# Altium PCB FuzzerFuca.PcbDoc
Units mm, origin at the board's own origin, x right, y up, seen from the top; angles counter-clockwise.
Board outline 40.1 x 45.1 mm, 2 copper layers (Top Layer, Bottom Layer); 19 components, 13 nets, 44 pads, 0 vias.
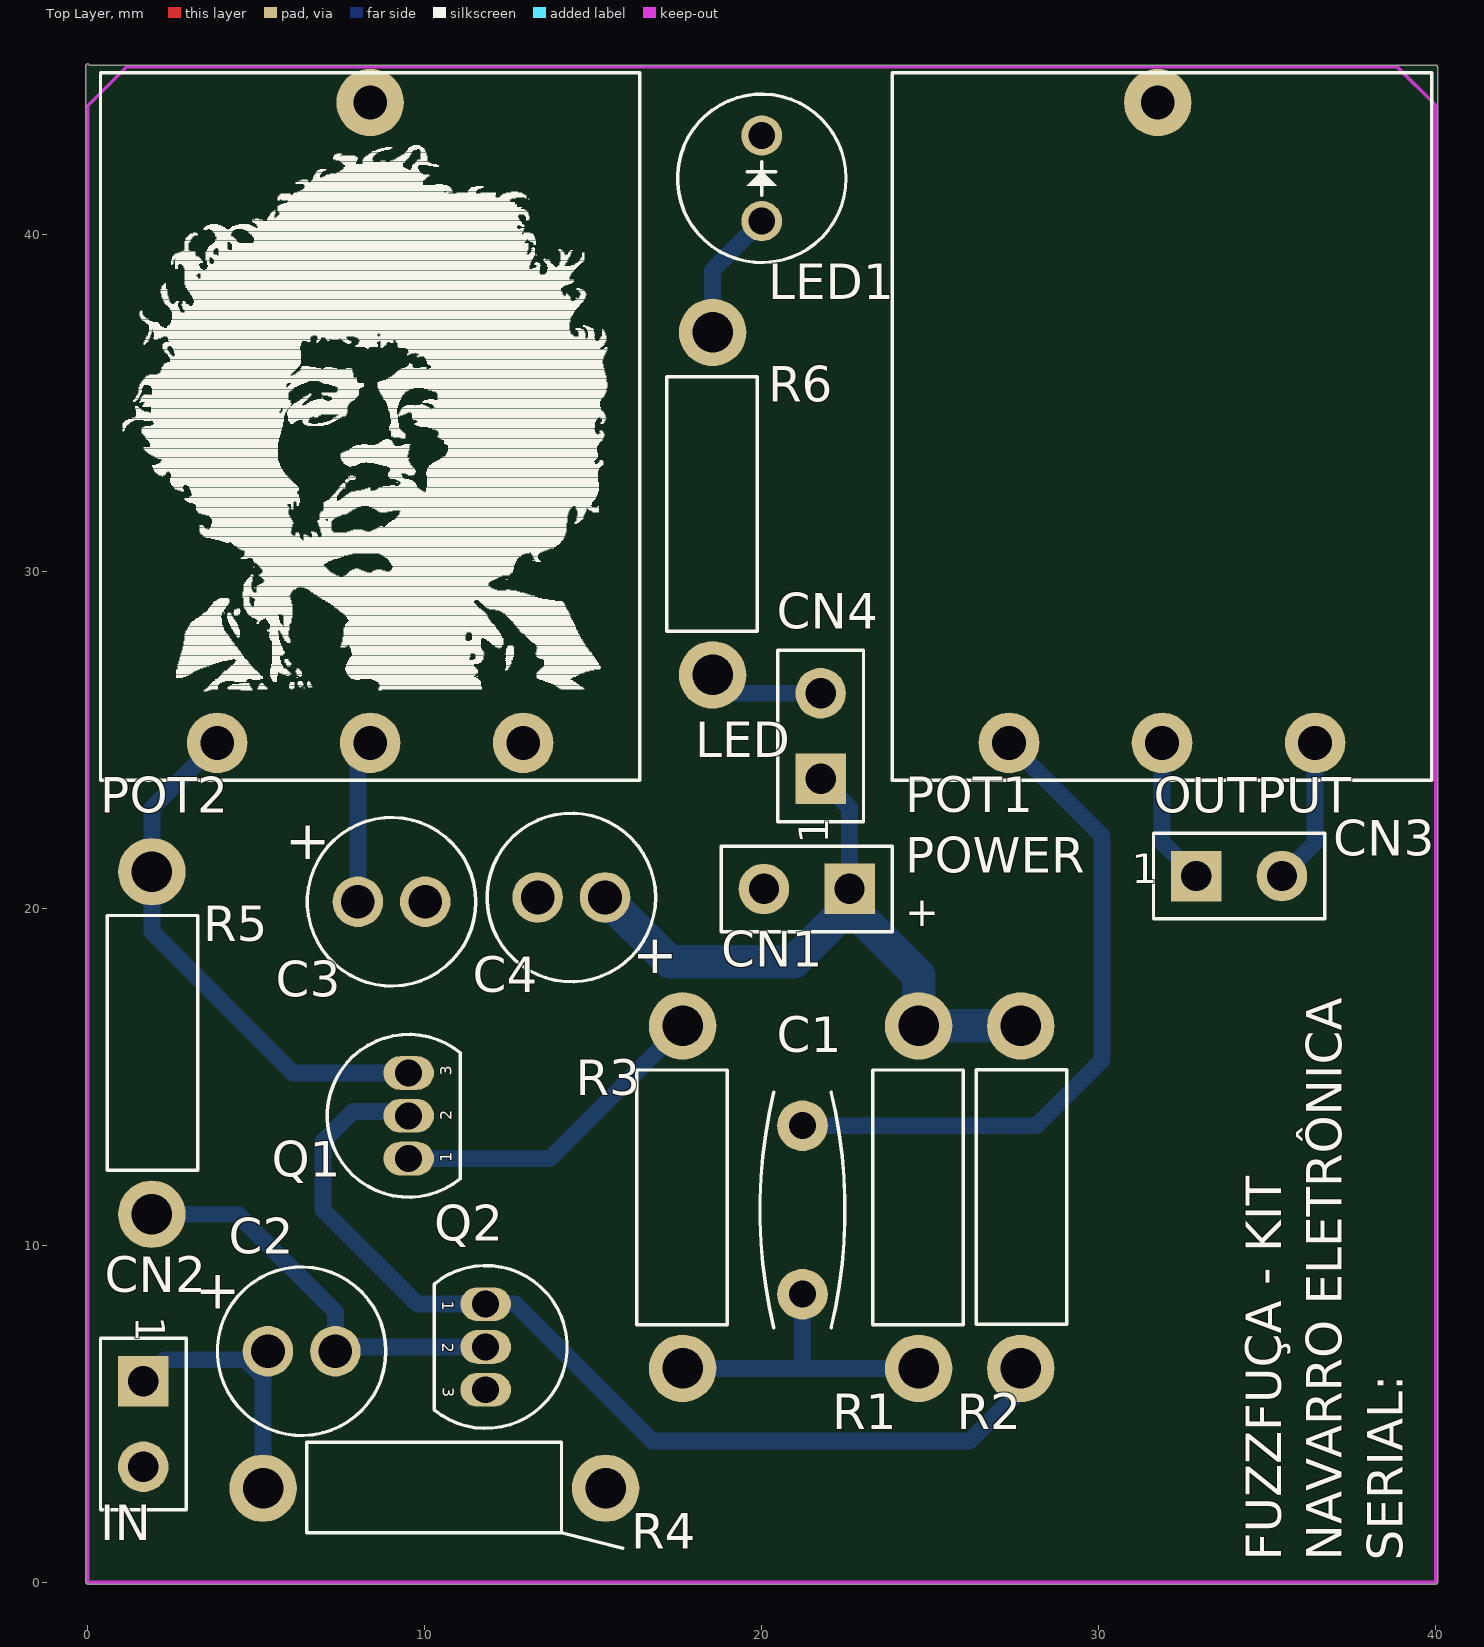
[diagram p0: Top Layer view]
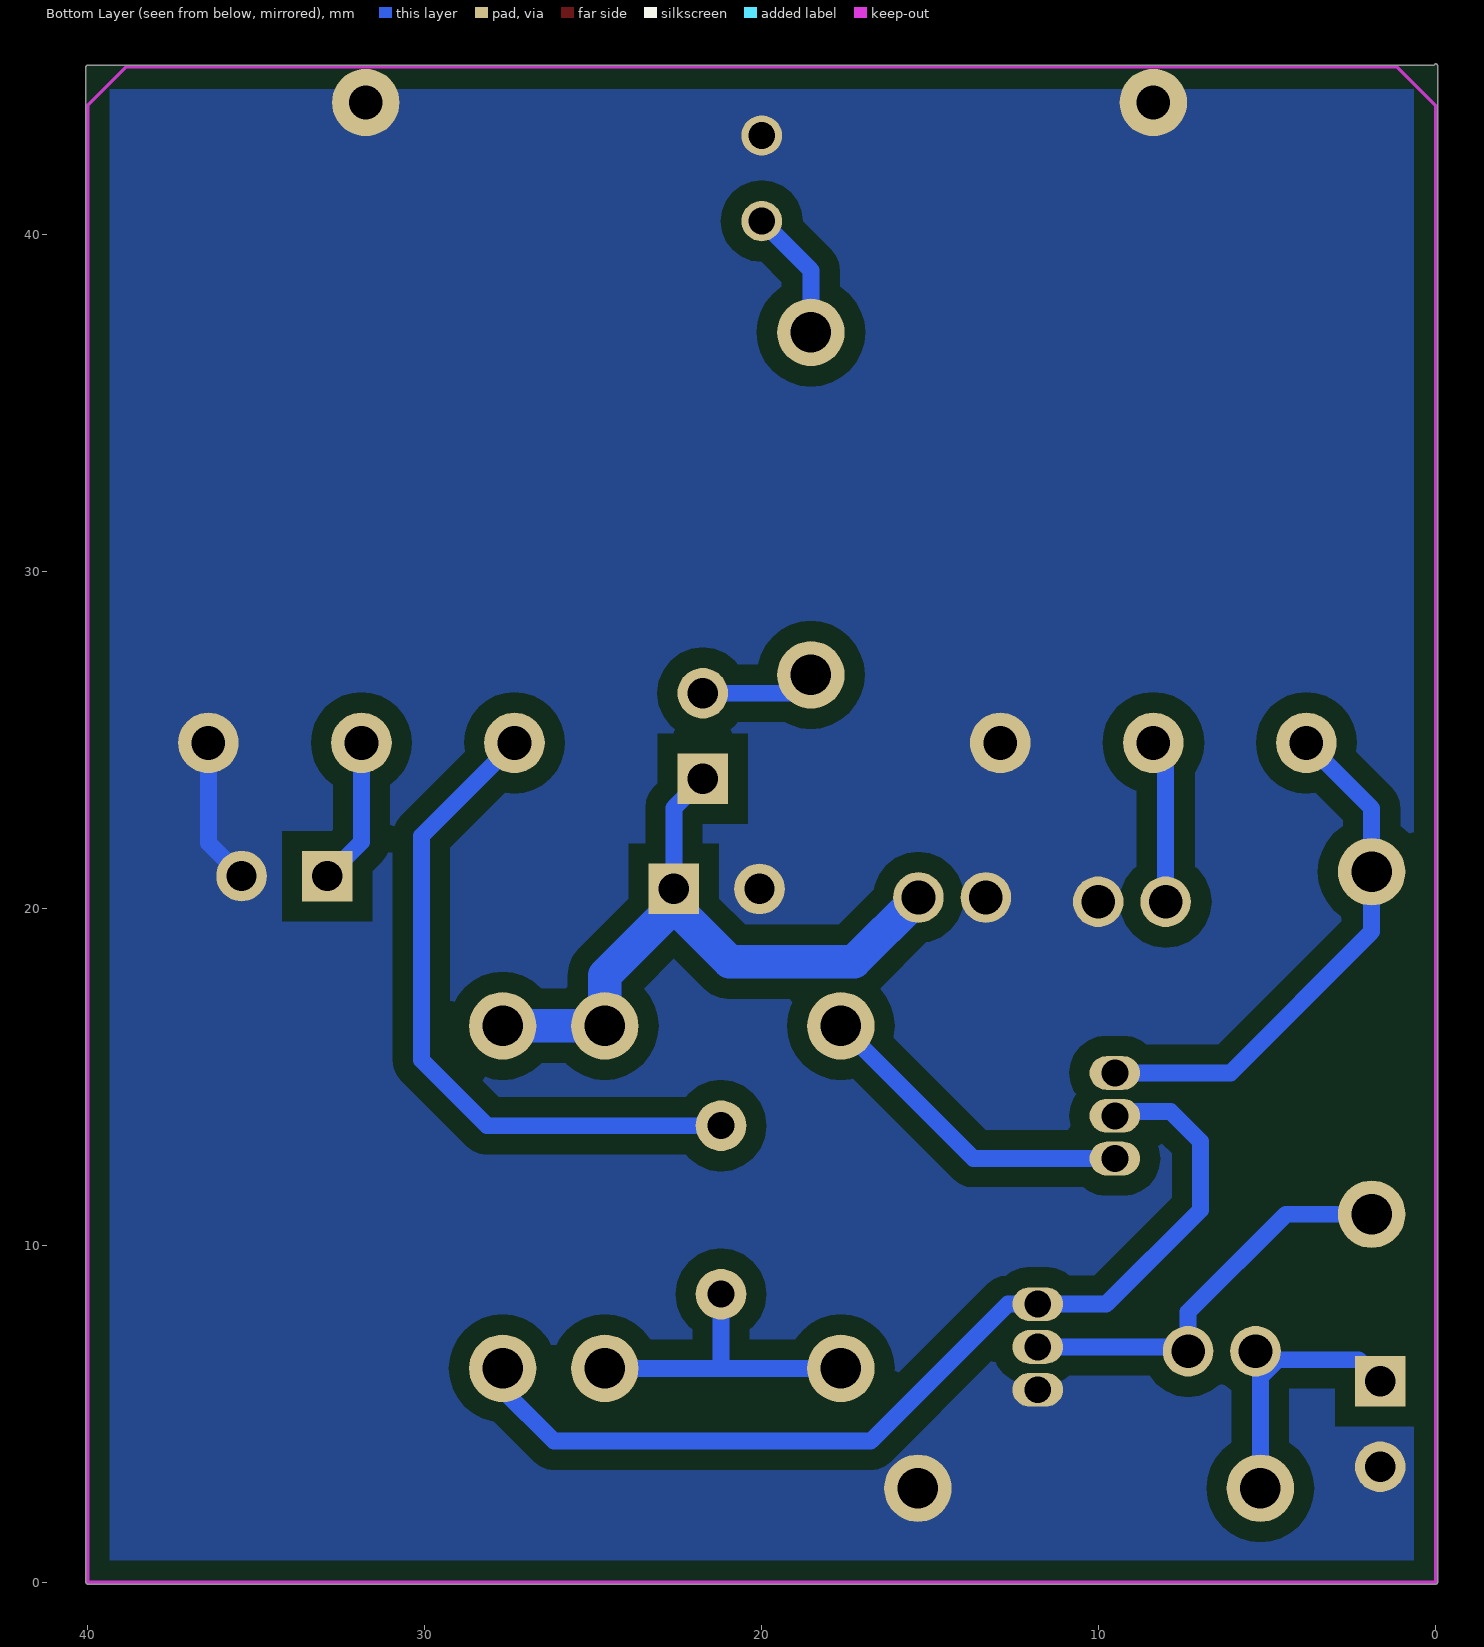
[diagram p1: Bottom Layer view, seen from below]
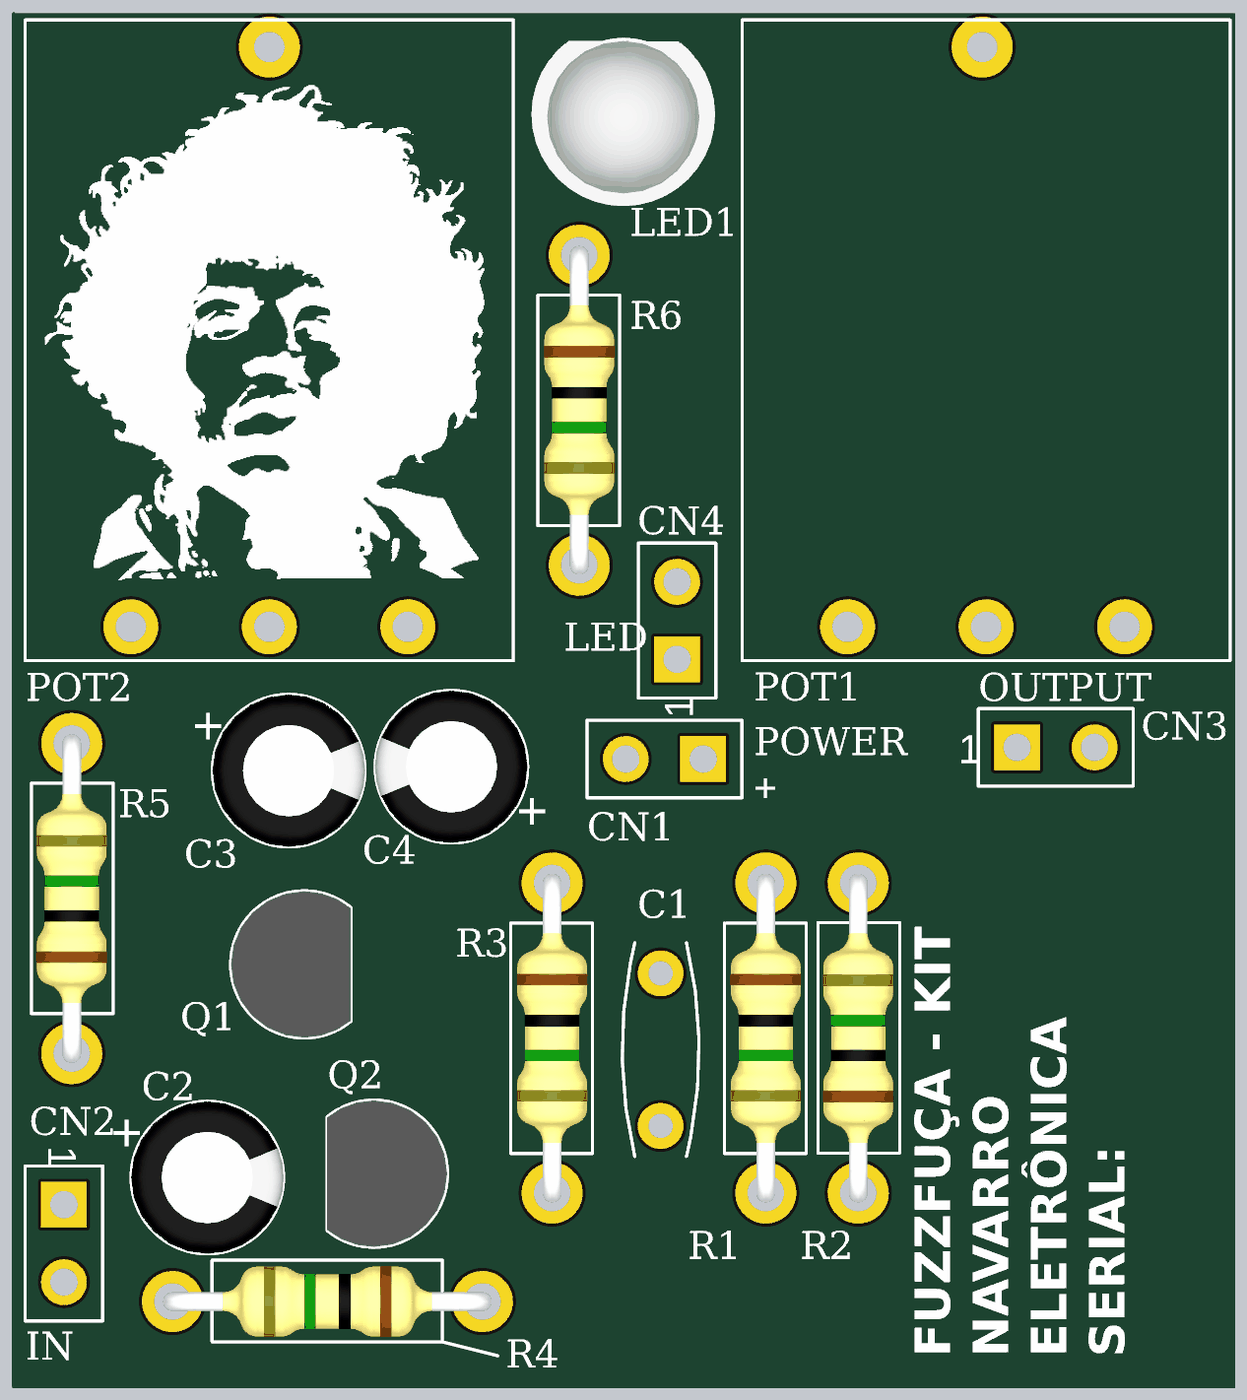
[diagram p2: 3D render of the assembled board from above, using the file's embedded part models]

## Layer stack, top to bottom
Top Solder: solder mask 0.0102, Solder Resist, Dk 3.5
Top Layer: signal copper 0.0356
Dielectric 1: dielectric 0.32, FR-4, Dk 4.8
Bottom Layer: signal copper 0.0356
Bottom Solder: solder mask 0.0102, Solder Resist, Dk 3.5

## Board outline
0,-0.05 cw(c0,0) -0.05,0 -0.05,45 cw(c0,45) 0.05,45.008 40,45.008 cw(c40,44.958) 40.05,44.958 40.05,0 cw(c40,0) 40,-0.05

## Design rules (kind name [scope] priority, off if disabled: settings)
Clearance [All] p1: gap=0.6
PolygonConnect [All] p1: connectstyle=Direct reliefconductorwidth=0.254 reliefentries=4 polygonreliefangle="90 Angle" airgapwidth=0.254
RoutingVias [All] p1: holewidth=0.711 width=1.27 viastyle="Through Hole" minholewidth=0.711 minwidth=1.27 maxholewidth=0.711 maxwidth=1.27
SolderMaskExpansion [All] p1: expansion=0.102
Width [All] p1: maxlimit=3 minlimit=0.254 preferedwidth=0.254
30 further rules are at their usual default settings.

## Classes and differential pairs
component class FuzzerFuça: C1 C2 C3 C4 CN1 CN2 CN3 CN4 LED1 POT2 Q1 Q2 R1 R2 R3 R4 R5 R6

## Components (designator, comment, footprint, x,y, rotation, side; value= is the part's Value field where it differs from the comment)
C1 "Capacitor Cerâmico" CCERAMIC-02I 21.209,11.049 r90 top
C2 "Capacitor Tântalo" CPOLRAD5X11 6.35,6.858 r0 top
C3 "Capacitor Tântalo" CPOLRAD5X11 9.017,20.193 r0 top
C4 "Capacitor Eletrolítico" CPOLRAD5X11 14.351,20.32 r180 top
CN1 "Header 2" "CONN HDR1X2" 22.606,20.574 r180 top
CN2 "Header 2" "CONN HDR1X2" 1.651,5.969 r270 top
CN3 "Header 2" "CONN HDR1X2" 32.893,20.955 r0 top
CN4 "Header 2" "CONN HDR1X2" 21.749,23.84 r90 top
LED1 "LED TH 5MM AZ" "LED 5MM" 20,41.656 r270 top
POT1 "Potenciômetro" "POT - GENERICO" 31.877,24.906 r0 top
POT2 "Potenciômetro" "POT - GENERICO" 8.382,24.906 r0 top
Q1 "BC548" TO-92 9.525,13.843 r90 top
Q2 "BC548" TO-92 11.811,6.985 r270 top
R1 "Resistor" "Axial 0.125W/H" 24.656,11.43 r270 top
R2 "Resistor" "Axial 0.125W/H" 27.686,11.43 r90 top
R3 "Resistor" "Axial 0.125W/H" 17.653,11.43 r270 top
R4 "Resistor" "Axial 0.125W/H" 10.287,2.794 r180 top
R5 "Resistor" "Axial 0.125W/H" 1.905,16.002 r90 top
R6 "Resistor" "Axial 0.125W/H" 18.542,32.004 r270 top

## Footprints (in the part's own frame and the unit in brackets; to place one, negate y for a bottom-side part, rotate by r counter-clockwise, add the part's x,y. Pads: shape width x height; smd on the part's side, far side on the other; paste and mask are expansions set on the pad)
"Axial 0.125W/H" [mm] "Resistor comum de 1/8W"
  round 2 hole 1.2: 1(-5.08,0) 2(5.08,0)
  silkscreen extent -3.77,-1.36 3.78,1.32, body extent -5.38,-1.16 5.38,1.16, height 2.93
CCERAMIC-02I [mm]
  round 1.5 hole 0.8: 1(-2.5,0) 2(2.5,0)
  silkscreen extent -3.5,-1.26 3.5,1.26, body extent -3.5,-0.85 3.5,0.85, height 7.5
"CONN HDR1X2" [mm] "Connector; Header; 2 Position"
  rect 1.5x1.5 hole 0.9: 1(0,0)
  round 1.5 hole 0.9: 2(2.54,0)
  silkscreen extent -1.27,-1.27 3.81,1.27
CPOLRAD5X11 [mm]
  round 1.5 hole 1: 1(-1,0) 2(1,0)
  silkscreen extent -2.5,-2.5 2.5,2.5, body extent -2.5,-2.5 2.49,2.5, height 11.01
"LED 5MM" [mm] "LED Radial Through Hole,  5.1mm X 3.7mm, Pitch 2.54mm"
  round 1.2 hole 0.8: 1(1.27,0) 2(-1.27,0)
  silkscreen extent -2.5,-2.5 2.5,2.5, body extent -2.46,-3.02 2.96,2.99, height 12.31
"POT - GENERICO" [mm] "Trimmer Through Hole"
  round 1.8 hole 1: 1(-4.54,0) 2(0,0) 3(4.54,0)
  silkscreen extent -8,-1.11 8,19.89
TO-92 [mm]
  oval 1x1.5 hole 0.8: 1(-1.27,0) 2(0,0) 3(1.27,0)
  silkscreen extent -2.41,-1.53 2.41,2.41, body extent -2.4,-1.53 2.4,2.4, height 8

## Part data
C1: library part "Cap 10nF 50V 0603 X7R 5%", "Capacitor (Semiconductor SIM Model)"
C2 C3: library part "PCap 2.2uF 16V 1206 LOESR", "Polarized Capacitor"
C4: library part "PCap 10uF 63V 5d.x13h", "Polarized Capacitor (Radial)"
CN1 CN2 CN3 CN4: "Header, 2-Pin"
LED1: "LED"
POT1 POT2: library part "POT 100k Audio", "Potenciometro"
Q1 Q2: library part "TRS BC548 30V 100mA TO-92", "NPN General Purpose Amplifier"
R1: library part "Res 470R 5% 0603 1/10W"
R2: library part "Res 33K 1% 0603 1/10W"
R3 R6: library part "Res 18K2 1% 0603 1/8W"
R4: library part "Res 1M 1% 0603 1/10W"
R5: library part "Res 100K 1% 0603 1/10W"

## Free pads (board coordinates)
  round 2 hole 1: 2(8.382,43.906) 2(31.75,43.906)

## Nets (pads, with @x,y where several pads share a name; then routed paths per layer and width w, separated by ;. In a path a pad name is that pad's centre, name@x,y a point inside that pad or via, vN(x,y) a via of type N, cw(c..) or ccw(c..) an arc to the next point about the centre after c; other vN are vias at no path point)
GND: C3.2 C4.2 CN1.2 CN2.2 CN3.2 LED1.2 pad.2 POT1.3 POT2.3 Q2.3 R4.1 | length 4.4
  Bottom Layer w0.5: CN3.2 36.417,21.939 POT1.3
IN: C2.1 CN2.1 R4.2 | length 7.8
  Bottom Layer w0.5: CN2.1 2.286,6.604 4.699,6.604 5.207,6.096 R4.2@5.207,2.286
NetC1_1: C1.1 R1.2 R3.2 | length 9.2
  Bottom Layer w0.5: R3.2 21.209,6.35 ; C1.1 21.209,6.35 ; R1.2 21.209,6.35
NetC1_2: C1.2 POT1.1 | length 20.3
  Bottom Layer w0.5: C1.2 28.154,13.549 30.099,15.494 30.099,22.144 POT1.1
NetC2_2: C2.2 Q2.2 R5.1 | length 12.1
  Bottom Layer w0.5: R5.1 4.445,10.922 7.35,8.017 C2.2 ; C2.2@7.477,6.985 Q2.2
NetC3_1: C3.1 POT2.2 | length 4.3
  Bottom Layer w0.5: C3.1 POT2.2@8.017,24.541
NetCN4_2: CN4.2 R6.2 | length 3.4
  Bottom Layer w0.5: R6.2 19.086,26.38 CN4.2
NetLED1_1: LED1.1 R6.1 | length 3.9
  Bottom Layer w0.5: R6.1 18.542,38.928 LED1.1
NetPOT2_1: POT2.1 Q1.3 R5.2 | length 15.8
  Bottom Layer w0.5: POT2.1 1.905,22.969 R5.2 1.905,19.304 6.096,15.113 Q1.3
NetQ1_1: Q1.1 R3.1 | length 9.8
  Bottom Layer w0.5: Q1.1 13.716,12.573 R3.1
NetQ1_2: Q1.2 Q2.1 R2.1 | length 29.6
  Bottom Layer w0.5: Q1.2@9.398,13.97 7.874,13.97 6.985,13.081 6.985,11.049 9.779,8.255 Q2.1 12.7,8.255 16.764,4.191 26.162,4.191 27.686,5.715 R2.1
OUT: CN3.1 POT1.2 | length 4.4
  Bottom Layer w0.5: POT1.2 31.877,21.971 CN3.1
VCC: C4.1 CN1.1 CN4.1 R1.1 R2.2 | length 19.8
  Bottom Layer w0.5: CN4.1 22.606,22.983 CN1.1
  Bottom Layer w1: C4.1 17.256,18.415 20.955,18.415 22.606,20.066 24.656,18.016 R1.1 R2.2

## Polygon pours and split planes (outlines as drawn)
GND on Bottom Layer "GND_L02_P000" (solid, remove dead copper, pour order 0): 0,45 40,45 40,0 0,0

## Keep-outs
Keep-Out Layer:
  lines w0.1: 0,0 0,43.815 1.143,44.958 38.862,44.958 40,43.82 40,0 0,0

## Silkscreen, mask and mechanical layers (free items; w line width, h text height)
Top Overlay:
  drawing of 2072 lines, arcs and shapes, not listed
  text "LED" at 18.034,24.13 h1.8
  text "OUTPUT" at 31.623,22.479 h1.8
  text "POWER" at 24.257,20.701 h1.8
  text "IN" at 0.381,0.889 h1.8
  text "FUZZFUÇA - KIT / NAVARRO ELETRÔNICA / SERIAL:" at 39.37,0.635 h1.8 r90

## Text inside footprints (layer, text, board x,y; h text height)
C2: Top Overlay "+" at 3.193,7.732 h2
C3: Top Overlay "+" at 5.86,21.067 h2
C4: Top Overlay "+" at 17.508,19.446 h2 r180
CN1: Top Overlay "+" at 24.257,19.177 h1.5
CN2: Top Overlay "1" at 1.137,7.89 h1.5 r270
CN3: Top Overlay "1" at 30.972,20.441 h1.5
CN4: Top Overlay "1" at 22.263,21.919 h1.5 r90
Q1: Top Overlay "1" at 10.929,12.467 h0.6 r90; Top Overlay "2" at 10.929,13.711 h0.6 r90; Top Overlay "3" at 10.922,15.035 h0.6 r90
Q2: Top Overlay "1" at 10.407,8.361 h0.6 r270; Top Overlay "2" at 10.407,7.117 h0.6 r270; Top Overlay "3" at 10.414,5.793 h0.6 r270